# Altium PCB MicroDStripLine.PcbDoc
Units mil, origin at the board's own origin, x right, y up, seen from the top; angles counter-clockwise.
Board outline 964 x 1127 mil, 2 copper layers (Top Layer, Bottom Layer); 2 components, 16 nets, 39 pads, 0 vias.
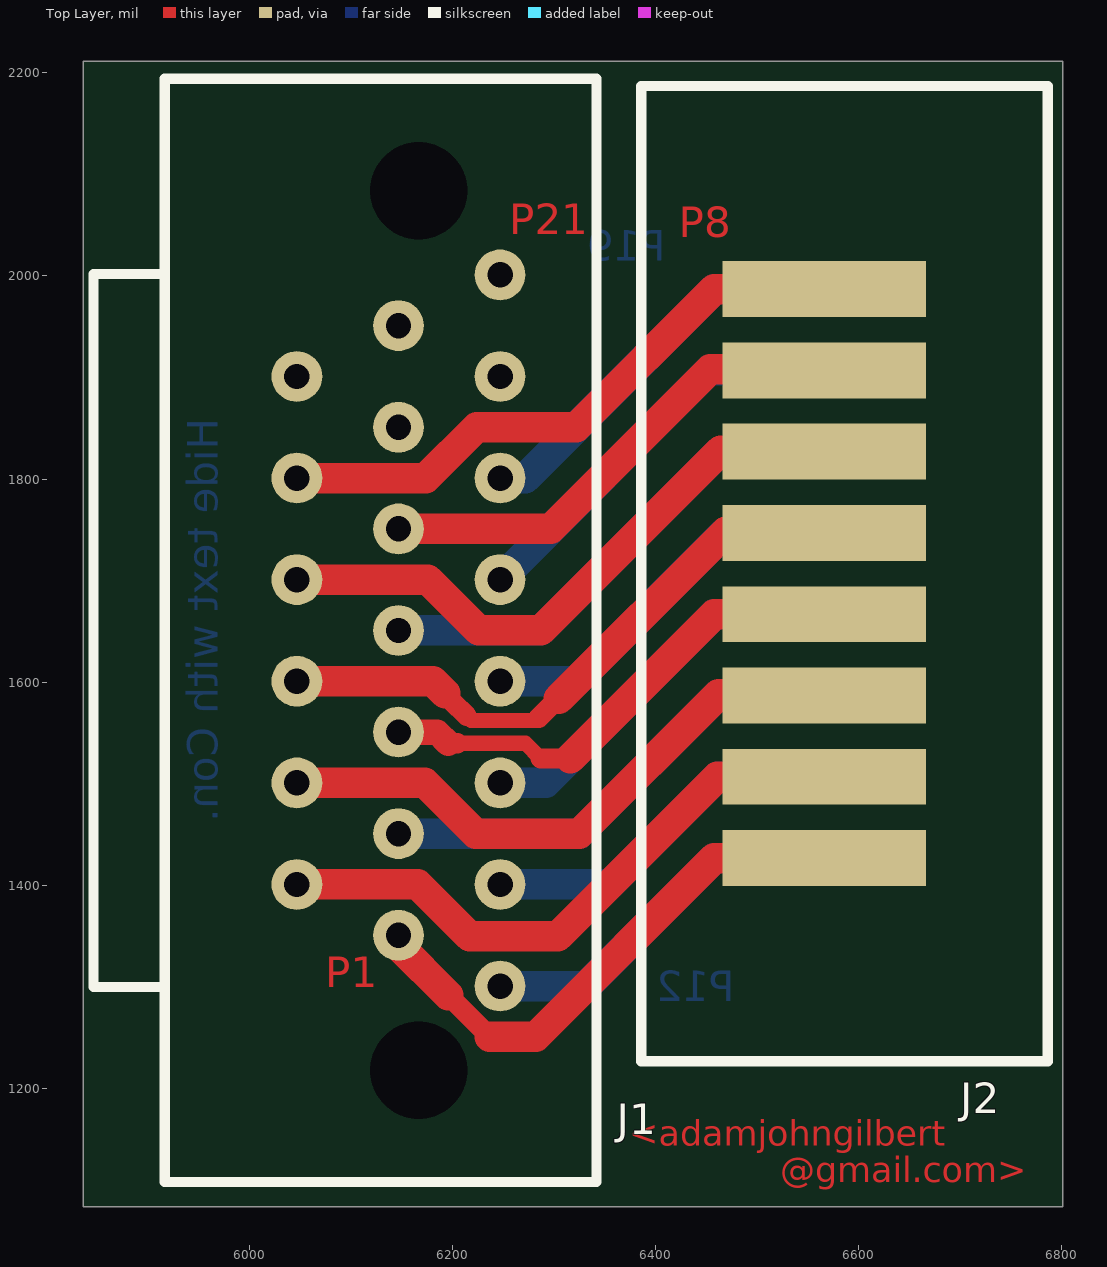
[diagram p0: Top Layer view]
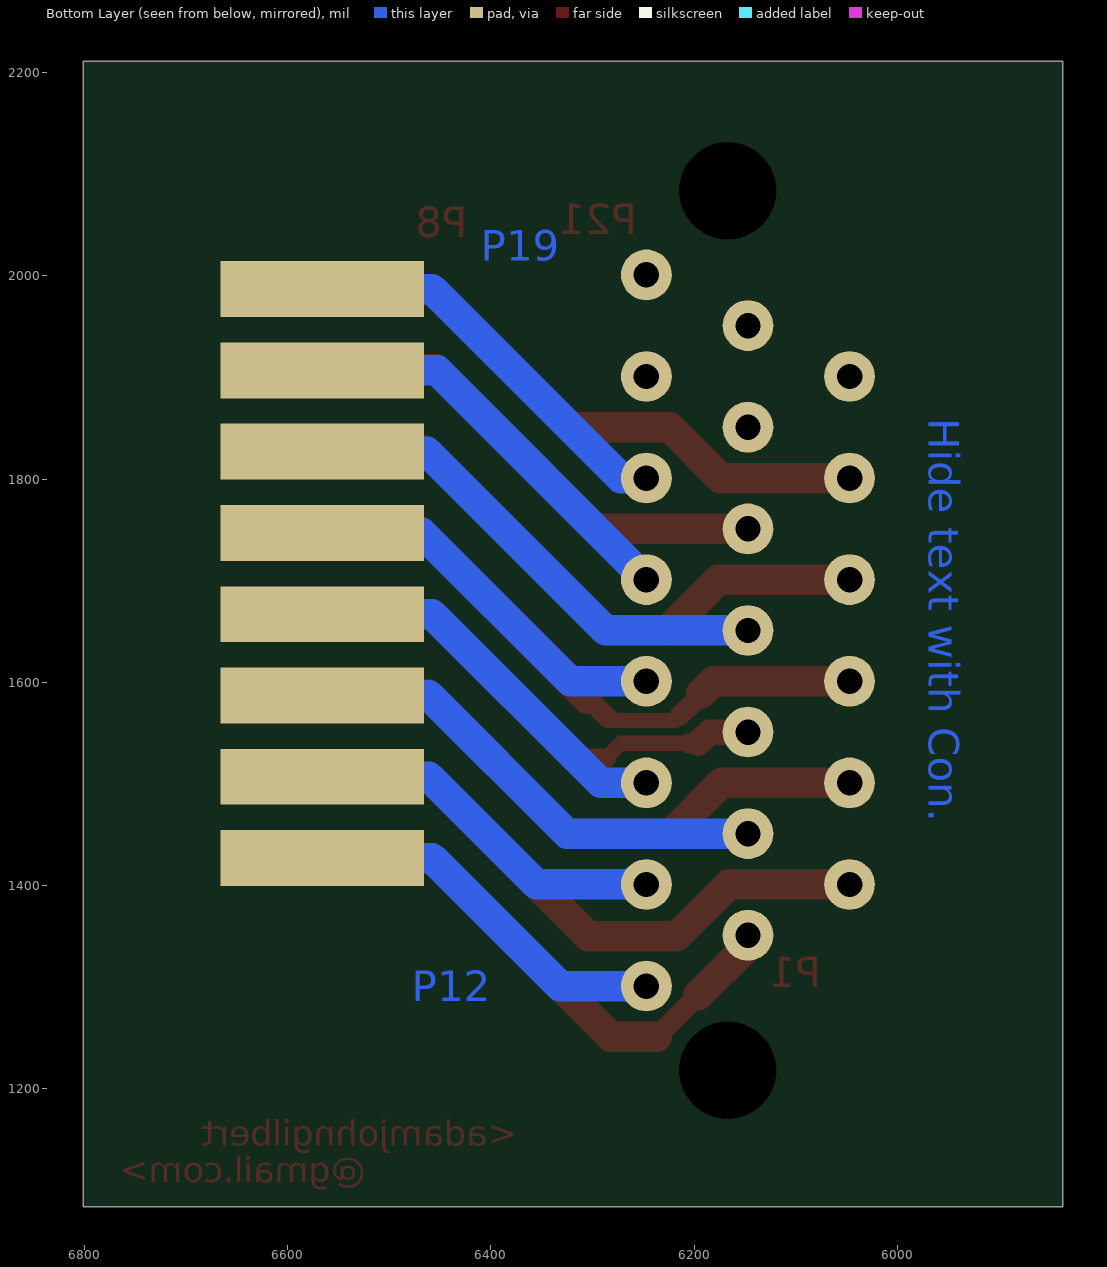
[diagram p1: Bottom Layer view, seen from below]

## Layer stack, top to bottom
Top Layer: signal copper 1.4
Dielectric: dielectric 12.6, FR-4, Dk 4.8
Bottom Layer: signal copper 1.4

## Board outline
5837,1084 6801,1084 6801,2211 5837,2211

## Design rules (kind name [scope] priority, off if disabled: settings)
Clearance [All] p1: gap=6
PolygonConnect [All] p1: connectstyle=Relief reliefconductorwidth=10 reliefentries=4 polygonreliefangle="90 Angle"
RoomDefinition MicroDStripLine [InComponentClass('MicroDStripLine')] p1: confinementstyle=ConfineIn formatcopy=TRUE lockcomponents=FALSE outline 6801,2211 5837,2211 5837,1084 6801,1084
RoutingVias [All] p1: holewidth=28 width=50 viastyle="Through Hole" minholewidth=28 minwidth=50 maxholewidth=28 maxwidth=50
SilkscreenOverComponentPads [All] p1: minsilkscreentomaskgap=10
SolderMaskExpansion [All] p1: expansion=4
Width [All] p1: maxlimit=100 minlimit=10 preferedwidth=40
27 further rules are at their usual default settings.

## Components (designator, comment, footprint, x,y, rotation, side; value= is the part's Value field where it differs from the comment)
J1 "GlenairMicroDsub21" MicroD21Glenair 6147,1351 r90 top
J2 "Stripline16pins" Stripline16pins 6786,1427 r90 top

## Footprints (in the part's own frame and the unit in brackets; to place one, negate y for a bottom-side part, rotate by r counter-clockwise, add the part's x,y. Pads: shape width x height; smd on the part's side, far side on the other; paste and mask are expansions set on the pad)
MicroD21Glenair [mil] "Glenair MicroD 21 pin"
  round 50 hole 25: 1(0,0) 2(50,100) 3(150,100) 4(200,0) 5(250,100) 6(350,100) 7(400,0) 8(450,100) 9(500,0) 10(550,100) 11(600,0) 12(-50,-100) 13(50,-100) 14(100,0) 15(150,-100) 16(250,-100) 17(300,0) 18(350,-100) 19(450,-100) 20(550,-100) 21(650,-100)
  round 60 hole 96: MH1(-133,-20) MH2(733,-20)
  silkscreen extent -243,-195 843,300
Stripline16pins [mil] "Stripline 16pins"
  rect 55x200 smd: 1(0,220) 2(80,220) 3(160,220) 4(240,220) 5(320,220) 6(400,220) 7(480,220) 8(560,220)
  rect 55x200 smd far side: 12(0,220) 13(80,220) 14(160,220) 15(240,220) 16(320,220) 17(400,220) 18(480,220) 19(560,220)
  silkscreen extent -200,0 760,400

## Nets (pads, with @x,y where several pads share a name; then routed paths per layer and width w, separated by ;. In a path a pad name is that pad's centre, name@x,y a point inside that pad or via, vN(x,y) a via of type N, cw(c..) or ccw(c..) an arc to the next point about the centre after c; other vN are vias at no path point)
NetJ1_1: J1.1 J2.1 | length 522.6
  Top Layer w20: J1.1@6147,1341 J1.1 ; 6195.95,1292.05 6237,1251
  Top Layer w30: J1.1@6147,1341 6195.95,1292.05 ; 6237,1251 6282,1251 6458,1427 6548,1427 J2.1@6549,1428
NetJ1_2: J1.2 J2.2 | length 587.2
  Top Layer w30: J1.2 6166,1401 6217,1350 6304,1350 6461,1507 J2.2@6548,1507
NetJ1_3: J1.3 J2.3 | length 579.5
  Top Layer w30: J1.3 6173,1501 6223,1451 6325,1451 6462,1588 J2.3@6549,1588
NetJ1_4: J1.4 J2.4 | length 472
  Top Layer w15: 6205,1540 6272,1540 6287,1525
  Top Layer w20: 6196,1540 6205,1540 ; 6287,1525 6316,1525
  Top Layer w25: J1.4 6185,1551 6196,1540
  Top Layer w30: 6316,1525 6458,1667 6548,1667 J2.4@6549,1668
NetJ1_5: J1.5 J2.5 | length 584.5
  Top Layer w15: 6214,1567 6218.5,1562.5 6282.5,1562.5 6285,1565
  Top Layer w20: 6200,1581 6214,1567 ; 6285,1565 6304,1584 6305,1584
  Top Layer w30: J1.5 6181,1601 6193,1589 ; 6305,1584 6469,1748 J2.5@6549,1748
NetJ1_6: J1.6 J2.6 | length 596
  Top Layer w30: J1.6 6176,1701 6226,1651 6287,1651 6464,1828 J2.6@6549,1828
NetJ1_7: J1.7 J2.7 | length 467
  Top Layer w30: J1.7 6297,1751 6454,1908 J2.7@6549,1908
NetJ1_8: J1.8 J2.8 | length 579.5
  Top Layer w30: J1.8 6174,1801 6224,1851 6322,1851 6458,1987 6548,1987 J2.8@6549,1988
NetJ1_12: J1.12 J2.12 | length 354.2
  Bottom Layer w30: J1.12 6332,1301 6458,1427 J2.12@6549,1427
NetJ1_13: J1.13 J2.13 | length 345.9
  Bottom Layer w30: J1.13 6355,1401 6461,1507 J2.13@6549,1507
NetJ1_14: J1.14 J2.14 | length 458.3
  Bottom Layer w30: J1.14 6325,1451 6461,1587 J2.14@6549,1587
NetJ1_15: J1.15 J2.15 | length 370.8
  Bottom Layer w30: J1.15 6292,1501 6458,1667 J2.15@6549,1667
NetJ1_16: J1.16 J2.16 | length 362.5
  Bottom Layer w30: J1.16 6322,1601 6468,1747 J2.16@6549,1747
NetJ1_17: J1.17 J2.17 | length 474.9
  Bottom Layer w30: J1.17 6287,1651 6463,1827 J2.17@6549,1827
NetJ1_18: J1.18 J2.18 | length 387.3
  Bottom Layer w30: J1.18 6453,1907 J2.18@6549,1907
NetJ1_19: J1.19 J2.19 | length 379
  Bottom Layer w30: J1.19 6272,1801 6458,1987 J2.19@6549,1987
pads on no net: J1.9 J1.10 J1.11 J1.20 J1.21 J1.MH1 J1.MH2

## Other copper
Top Layer:
  text "P21" at 6256,2041 h30
  text "P8" at 6423,2038 h30
  text "P1" at 6075,1300 h30
  text "<adamjohngilbert" at 6374,1144 h25
  text "@gmail.com>" at 6523,1108 h25
Bottom Layer:
  text "P19" at 6410,2015 h30
  text "Hide text with Con." at 5969,1860 h30 r90
  text "P12" at 6478,1286 h30